# Altium PCB Keypad.PcbDoc
Units mil, origin at the board's own origin, x right, y up, seen from the top; angles counter-clockwise.
Board outline 2659 x 2418 mil, 2 copper layers (Top Layer, Bottom Layer); 22 components, 26 nets, 76 pads, 1 vias.
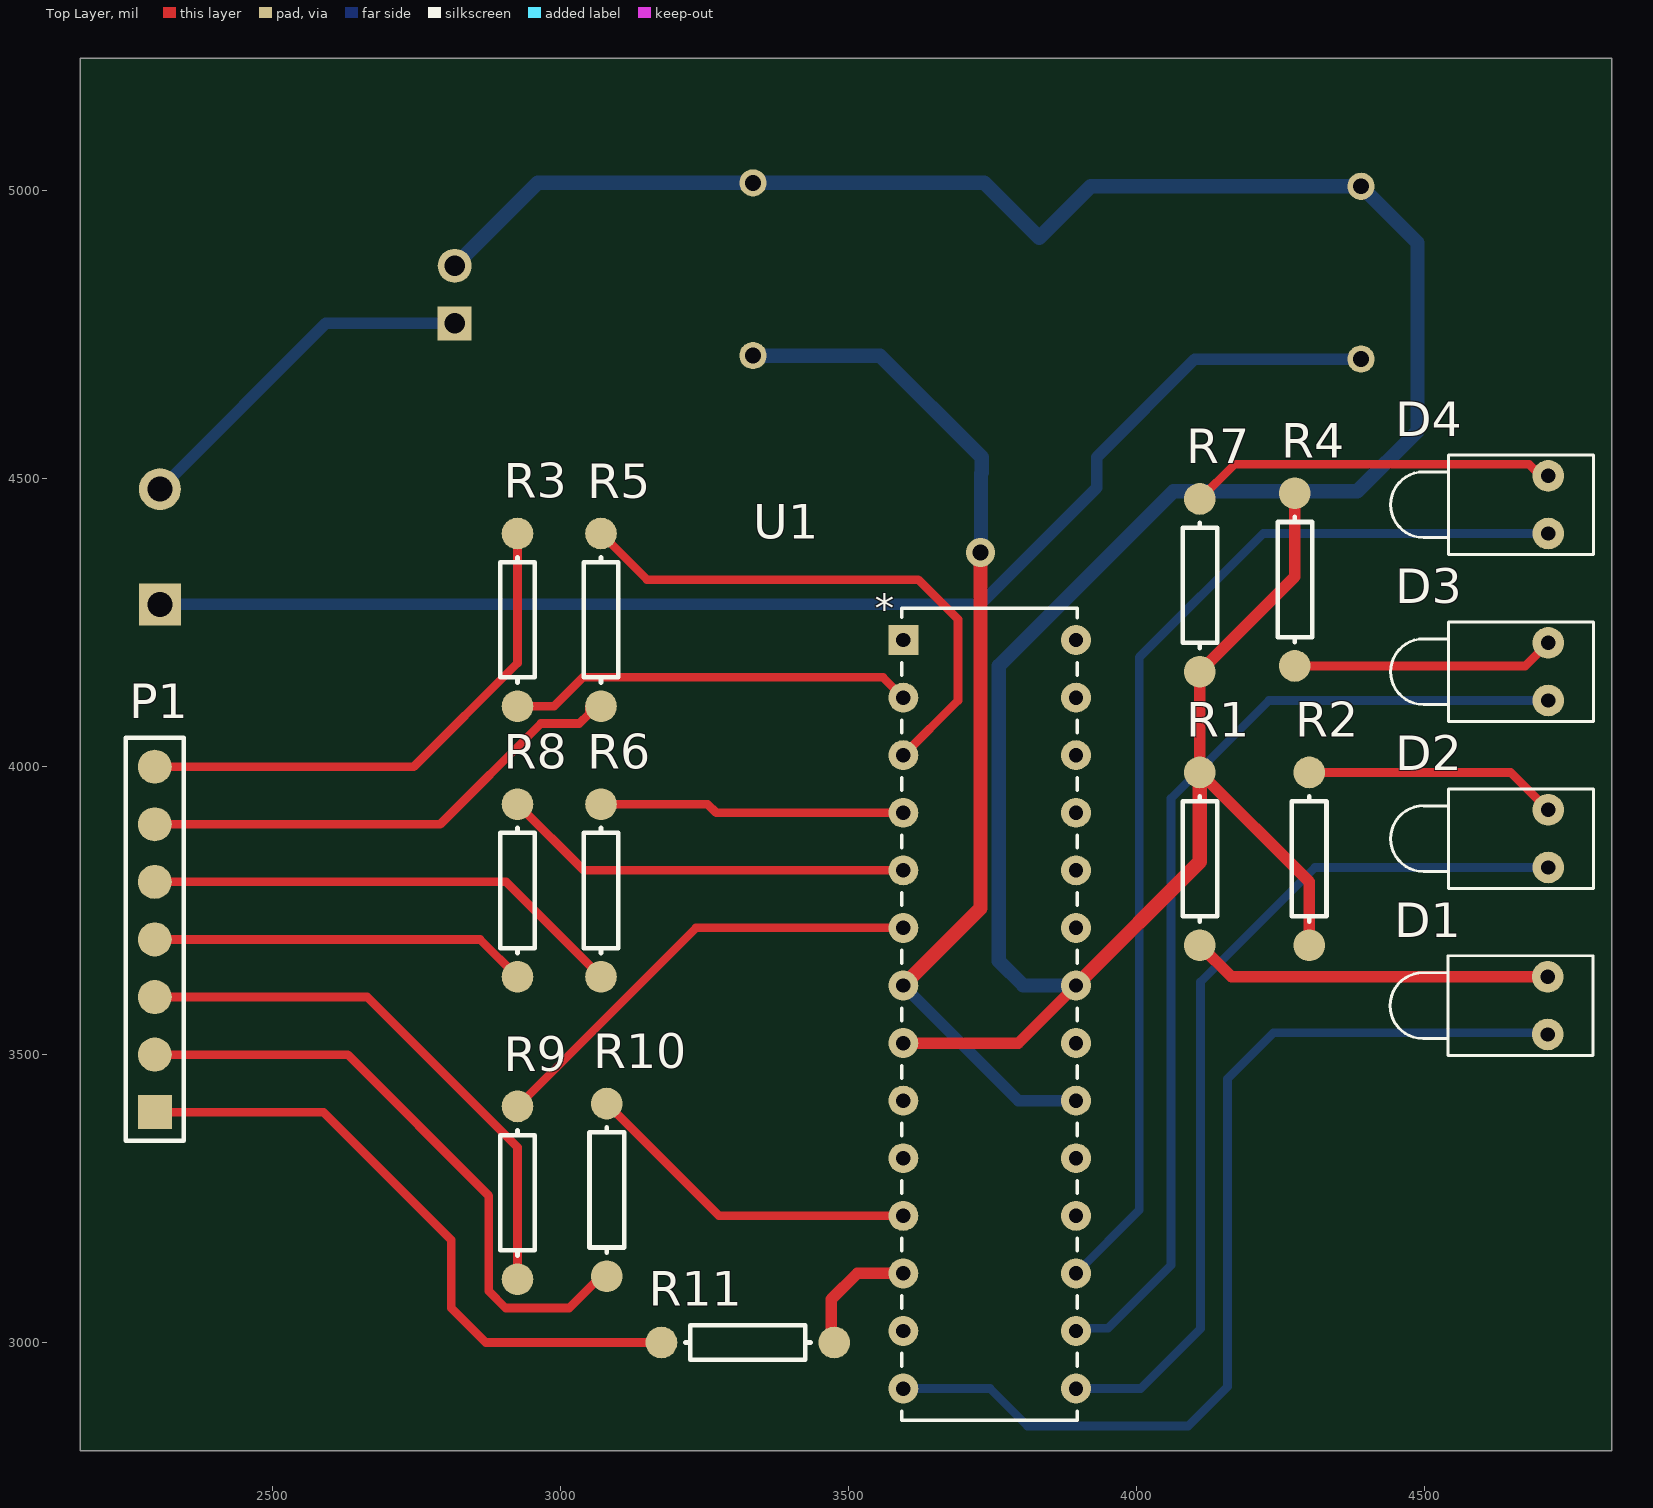
[diagram p0: Top Layer view]
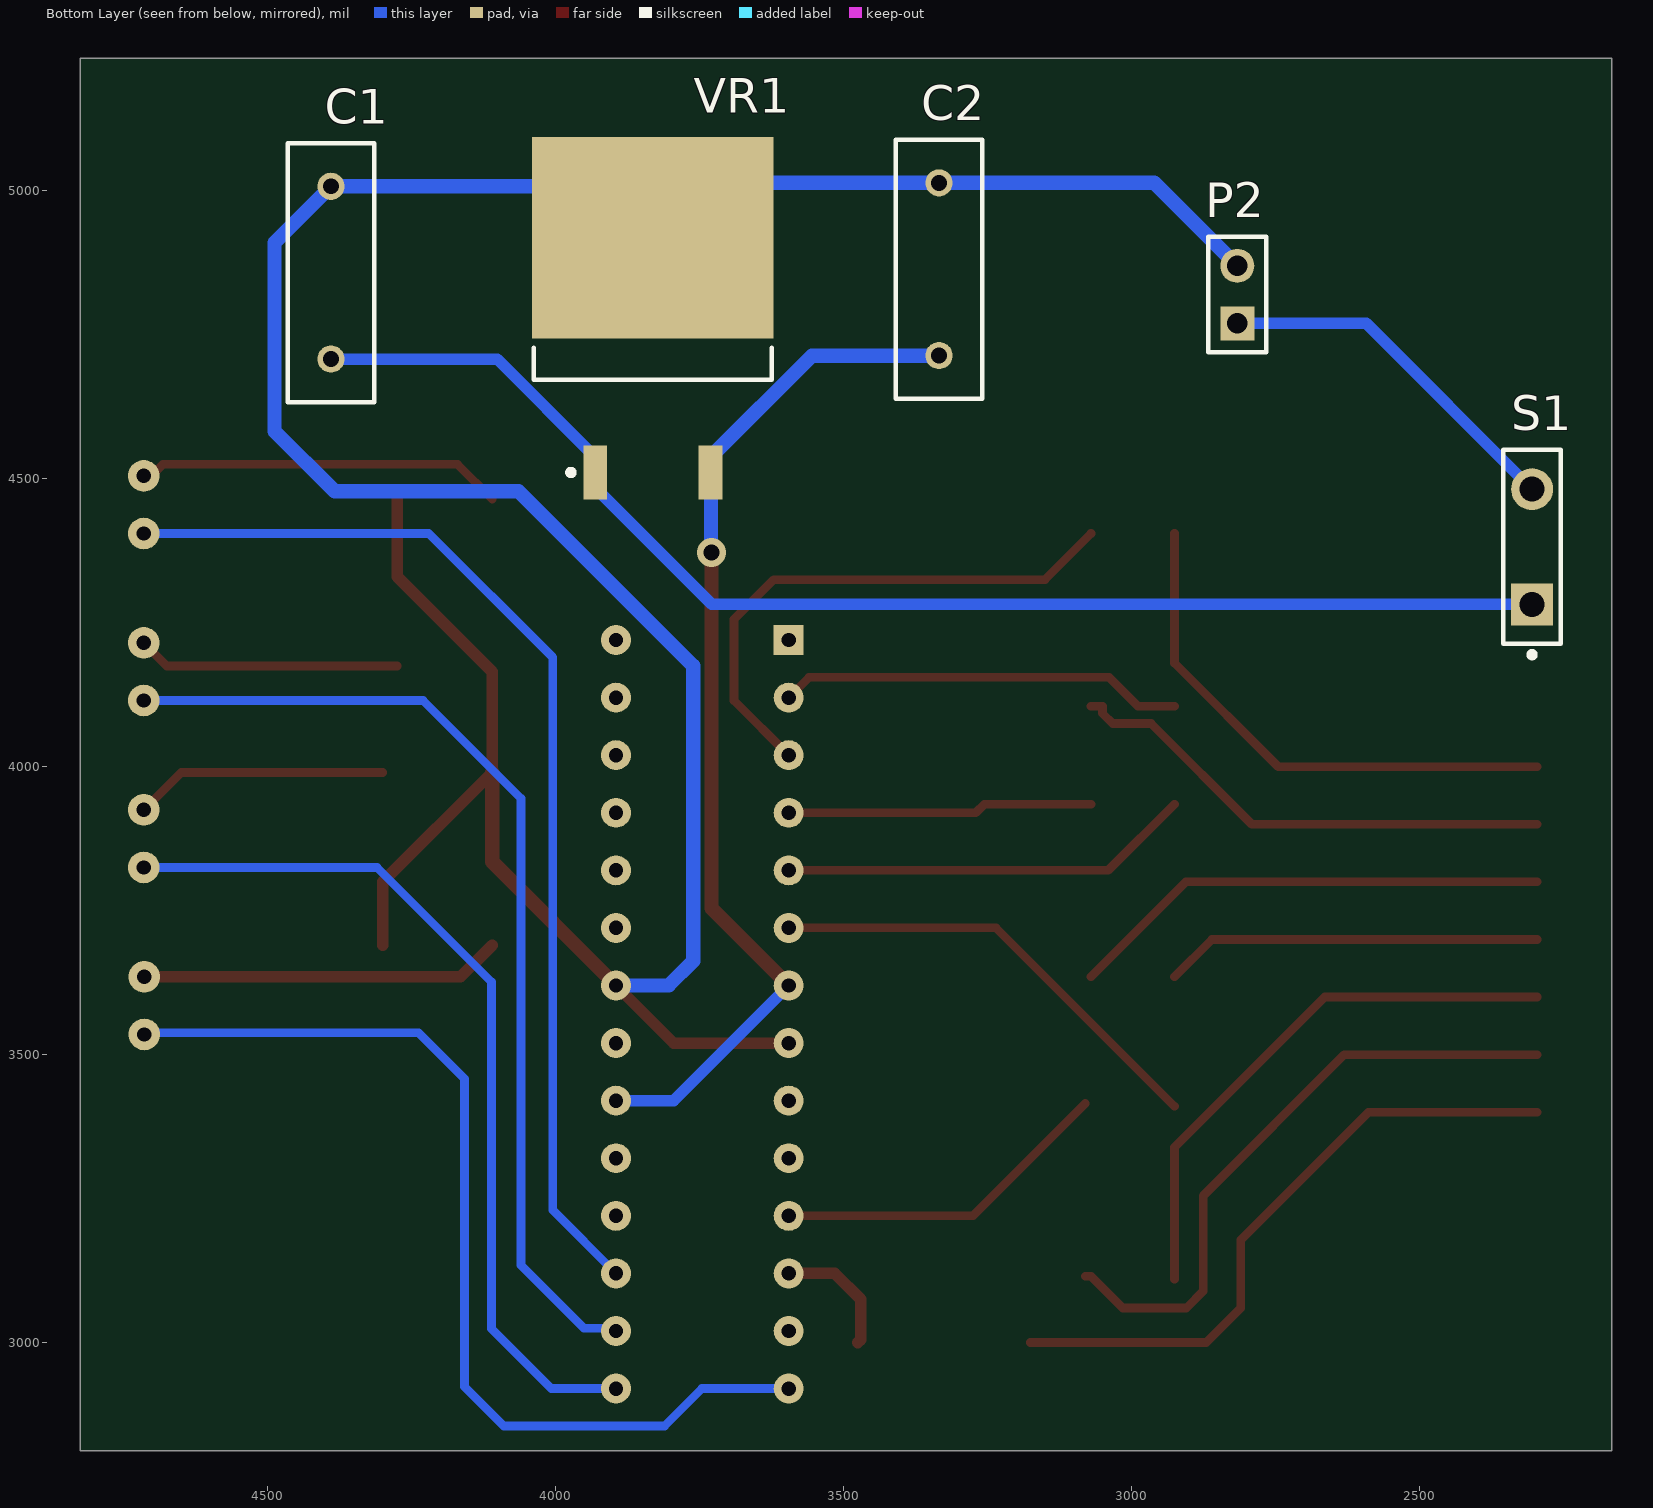
[diagram p1: Bottom Layer view, seen from below]

## Layer stack, top to bottom
Top Solder: solder mask 0.4, Solder Resist, Dk 3.5
Top Layer: signal copper 1.4
Dielectric 1: dielectric 12.6, FR-4, Dk 4.8
Bottom Layer: signal copper 1.4
Bottom Solder: solder mask 0.4, Solder Resist, Dk 3.5

## Board outline
2166,2812 4825,2812 4825,5230 2166,5230

## Design rules (kind name [scope] priority, off if disabled: settings)
Clearance [All] p1: gap=15 ignorepadtopadclearanceinfootprint=FALSE except(20: Arc-Hole Track-Hole SMDPad-Hole THPad-Hole Via-Hole Fill-Hole Poly-Hole Region-Hole Text-Hole)
PolygonConnect [All] p1: connectstyle=Relief reliefconductorwidth=10 reliefentries=4 polygonreliefangle="90 Angle" airgapwidth=10
RoutingVias [All] p1: holewidth=28 width=50 viastyle="Through Hole" minholewidth=28 minwidth=50 maxholewidth=28 maxwidth=50
SilkToSilkClearance [All] p1: silktosilkclearance=5
SilkToSolderMaskClearance [IsPad] p1: minsilkscreentomaskgap=5 clearancetoexposedcopper=TRUE
SolderMaskExpansion [All] p1: expansion=4
Width Width_1 [InNet('+5V0') or InNet('GND')] p1: maxlimit=25 minlimit=15 preferedwidth=20 minimp=50.000000 maximp=50.000000 favimp=50.000000
Width [All] p2: maxlimit=20 minlimit=10 preferedwidth=15 minimp=50.000000 maximp=50.000000 favimp=50.000000
28 further rules are at their usual default settings.

## Components (designator, comment, footprint, x,y, rotation, side; value= is the part's Value field where it differs from the comment)
C1 "Cap" RAD-0.3 4390,4858 r90 bottom value=330pF
C2 "Cap" RAD-0.3 3334,4864 r90 bottom value=100pF
D1 "LED1" LED-1 4714,3585 r180 top
D2 "LED1" LED-1 4715,3875 r180 top
D3 "LED1" LED-1 4715,4165 r180 top
D4 "LED1" LED-1 4715,4455 r180 top
P1 "Header 7" HDR1X7 2295,3400 r90 top
P2 "Battery Holder" HDR1X2 2816,4770 r90 bottom
R1 "220Ω" AXIAL-0.3 4110,3840 r90 top value=220
R2 "220Ω" AXIAL-0.3 4300,3840 r270 top value=220
R3 "100Ω" AXIAL-0.3 2925,4255 r270 top value=100
R4 "220Ω" AXIAL-0.3 4275,4325 r90 top value=220
R5 "100Ω" AXIAL-0.3 3070,4255 r90 top value=100
R6 "100Ω" AXIAL-0.3 3070,3785 r90 top value=100
R7 "220Ω" AXIAL-0.3 4110,4315 r270 top value=220
R8 "100Ω" AXIAL-0.3 2925,3785 r90 top value=100
R9 "100Ω" AXIAL-0.3 2925,3260 r90 top value=100
R10 "100Ω" AXIAL-0.3 3080,3265 r90 top value=100
R11 "100Ω" AXIAL-0.3 3325,3000 r0 top value=100
S1 "SW-SPST" SPST-2 2304,4382 r90 bottom
U1 "ATMEGA328-PU" 28P3_SPDIP28_SP_MCH 3595,4220 r0 top
VR1 "Volt Reg" D2PAK_N 3831,4778.72 r90 bottom

## Footprints (in the part's own frame and the unit in brackets; to place one, negate y for a bottom-side part, rotate by r counter-clockwise, add the part's x,y. Pads: shape width x height; smd on the part's side, far side on the other; paste and mask are expansions set on the pad)
28P3_SPDIP28_SP_MCH [mil]
  rect 52x52 hole 25 mask+0: 1(0,0)
  round 52 hole 25 mask+0: 2(0,-100) 3(0,-200) 4(0,-300) 5(0,-400) 6(0,-500) 7(0,-600) 8(0,-700) 9(0,-800) 10(0,-900) 11(0,-1000) 12(0,-1100) 13(0,-1200) 14(0,-1300) 15(300,-1300) 16(300,-1200) 17(300,-1100) 18(300,-1000) 19(300,-900) 20(300,-800) 21(300,-700) 22(300,-600) 23(300,-500) 24(300,-400) 25(300,-300) 26(300,-200) 27(300,-100) 28(300,0)
  silkscreen extent -2,-1355 302,55, body extent 0,0 10,10, height 10
AXIAL-0.3 [mm] "Axial Device, Thru-Hole; 2 Leads; 0.3 in Pin Spacing"
  round 1.4 smd: 1(-3.81,0) 2(3.81,0)
  silkscreen extent -2.77,-0.76 2.77,0.76
D2PAK_N [mm] "D2-PAK, 4-Leads, Body 8.8x10.4mm, Pitch 2.54mm, Lead Span 15.1mm, IPC Medium Density"
  rect 2.4x1.05 smd: 1(-6.8,2.54) 3(-6.8,-2.54)
  rect 8.9x10.65 smd: 2(3.55,0)
  silkscreen extent -6.92,-5.25 -1.3,5.25, body extent -2.7,-5.28 6.3,5.28, height 4.69
HDR1X2 [mm] "Connector; Header; 2 Position"
  rect 1.5x1.5 hole 0.9: 1(0,0)
  round 1.5 hole 0.9: 2(2.54,0)
  silkscreen extent -1.27,-1.27 3.81,1.27
HDR1X7 [mm] "Connector; Header; 7 Position"
  rect 1.5x1.5 smd: 1(0,0)
  round 1.5 smd: 2(2.54,0) 3(5.08,0) 4(7.62,0) 5(10.16,0) 6(12.7,0) 7(15.24,0)
  silkscreen extent -1.27,-1.27 16.51,1.27
LED-1 [mil] "LED; 2 Leads"
  round 55 hole 25: 1(0,50) 2(0,-50)
  silkscreen extent -79,-87 274,87
RAD-0.3 [mm] "Radial Cap, Thru-Hole; 2 Leads; 0.3 in Pin Spacing"
  round 1.2 hole 0.7: 1(-3.81,0) 2(3.81,0)
  silkscreen extent -5.71,-1.91 5.71,1.91
SPST-2 [mm] "Switch; 2 Leads"
  rect 1.85x1.85 hole 1.1: 1(-2.54,0)
  round 1.85 hole 1.1: 2(2.54,0)
  silkscreen extent -4.89,-1.27 4.28,1.27

## Part data
C1 C2: "Capacitor", LatestRevisionDate=17-Jul-2002, LatestRevisionNote="Re-released for DXP Platform.", PackageDescription="Radial Cap, Thru-Hole; 2 Leads; 0.3 in Pin Spacing", PackageReference=RAD-0.3, Published=8-Jun-2000, Publisher="Altium Limited"
D1 D2 D3 D4: "Typical RED GaAs LED", LatestRevisionDate=08-Jul-2005, LatestRevisionNote="Mech Layer 1 removed.", PackageDescription="LED; 2 Leads", PackageReference=LED-1, Published=8-Jun-2000, Publisher="Altium Limited"
P1: "Header, 7-Pin", LatestRevisionDate=17-Jul-2002, LatestRevisionNote="Re-released for DXP Platform.", Publisher="Altium Limited"
P2: library part "Header 2", "Header, 2-Pin", LatestRevisionDate=17-Jul-2002, LatestRevisionNote="Re-released for DXP Platform.", Publisher="Altium Limited"
R1 R2 R3 R4 R5 R6 R7 R8 R9 R10 R11: library part Res1, "Resistor", LatestRevisionDate=17-Jul-2002, LatestRevisionNote="Re-released for DXP Platform.", PackageDescription="Axial Device, Thru-Hole; 2 Leads; 0.3 in Pin Spacing", PackageReference=AXIAL-0.3, Published=8-Jun-2000, Publisher="Altium Limited"
S1: "Single-Pole, Single-Throw Switch", LatestRevisionDate=17-Jul-2002, LatestRevisionNote="Re-released for DXP Platform.", PackageDescription="Switch; 2 Leads", PackageReference=SPST-2, Published=24-Mar-1999, Publisher="Altium Limited"
U1: "No Description Available", Built_By=EMA_Cory, Copyright="Copyright (C) 2018 Accelerated Designs. All rights reserved", Datasheet=https://ww1.microchip.com/downloads/en/DeviceDoc/ATmega48A-PA-88A-PA-168A-PA-328-P-DS-DS40002061B.pdf, Manufacturer_Part_Number=ATMEGA328-PU, RefDes=RefDes, SourceLibrary=Update_to_database_2021-05-13, Type=DEV, Vendor=Microchip
VR1: "Voltage Regulator", LatestRevisionDate=29-May-2009, LatestRevisionNote="IPC-7351 Footprint Added.", PackageDescription="3-Pin Transistor Outline Package 2.54 mm Pitch, 15.1 mm Lead Span", PackageReference=D2PAK, Published=24-Mar-1999, Publisher="Altium Limited"

## Via types
v1: diameter 50, hole 28, Top Layer to Bottom Layer, 1 vias

## Nets (pads, with @x,y where several pads share a name; then routed paths per layer and width w, separated by ;. In a path a pad name is that pad's centre, name@x,y a point inside that pad or via, vN(x,y) a via of type N, cw(c..) or ccw(c..) an arc to the next point about the centre after c; other vN are vias at no path point)
+5V0: C2.1 U1.7 U1.20 VR1.3 | length 1826.8
  Top Layer w25: U1.7 3729,3754 v1(3729,4372)
  Bottom Layer w20: U1.7 3795,3420 U1.20
  Bottom Layer w25: C2.1 3554.57,4714 3731,4537.57 VR1.3 3730,4510 3730,4373 v1(3729,4372)
GND: C1.2 C2.2 P2.2 R1.2 R2.2 R4.2 R7.2 U1.8 U1.22 VR1.2 | length 5468.6
  Top Layer w20: U1.8 3795,3520 U1.22 ; R4.2 4275,4330 R7.2 R1.2 4300,3800 R2.2
  Top Layer w25: U1.22 4110,3835 R1.2
  Bottom Layer w25: P2.2 2960,5014 C2.2 3735.48,5014 VR1.2 3920.52,5008 C1.2 4488,4910 4488,4582.71 4383.64,4478.36 4064.36,4478.36 3761,4175 3761,3662.64 3803.64,3620 U1.22
NetD1_1: D1.1 U1.14 | length 1743.5
  Bottom Layer w15: U1.14 3745.68,2920 3810.68,2855 4090,2855 4158,2923 4158,3458 4238,3538 4711,3538 D1.1
NetD1_2: D1.2 R1.1 | length 639.8
  Top Layer w15: D1.2@4702.01,3650 D1.2@4715,3650
  Top Layer w20: R1.1 4165,3635 D1.2
NetD2_1: D2.1 U1.15 | length 1547.7
  Bottom Layer w15: U1.15 4007.25,2920 4111.25,3024 4111.25,3626.25 4310,3825 D2.1
NetD2_2: D2.2 R2.1 | length 441.9
  Top Layer w15: R2.1 4650,3990 D2.2
NetD3_1: D3.1 U1.16 | length 1748.6
  Bottom Layer w15: U1.16@3900,3025 3951,3025 4060,3134 4060,3945 4230,4115 D3.1
  Bottom Layer w20: U1.16 U1.16@3900,3025
NetD3_2: D3.2 R4.1 | length 456.6
  Top Layer w15: R4.1 4675,4175 D3.2
NetD4_1: D4.1 U1.17 | length 1914.6
  Bottom Layer w15: U1.17 4005,3230 4005,3257 4005,4190 4220,4405 D4.1
NetD4_2: D4.2 R7.1 | length 638.2
  Top Layer w15: R7.1 4170.06,4525.06 4681.95,4525.06 4702.01,4505 D4.2
NetP1_1: P1.1 R11.1 | length 1114.9
  Top Layer w15: P1.1 2588.1,3400 2810,3178.1 2810,3060 2870,3000 R11.1
NetP1_2: P1.2 R10.1 | length 1087.2
  Top Layer w15: P1.2 2630,3500 2874.94,3255.06 2874.94,3089.26 2904.26,3059.94 3014.94,3059.94 3070,3115 R10.1
NetP1_3: P1.3 R9.1 | length 967.2
  Top Layer w15: P1.3 2664.21,3600 2925,3339.21 R9.1
NetP1_4: P1.4 R8.1 | length 656.9
  Top Layer w15: P1.4 2860,3700 R8.1
NetP1_5: P1.5 R6.1 | length 843.3
  Top Layer w15: P1.5 2905,3800 R6.1
NetP1_6: P1.6 R5.1 | length 867.2
  Top Layer w15: P1.6 2790.79,3900 2965.79,4075 3032.37,4075 3049.94,4092.57 3049.94,4105 R5.1
NetP1_7: P1.7 R3.1 | length 929.6
  Top Layer w15: P1.7 2745,4000 2925,4180 R3.1
NetP2_1: P2.1 S1.2 | length 631.3
  Bottom Layer w20: S1.2 2592,4770 P2.1
NetR3_2: R3.2 U1.2 | length 705.3
  Top Layer w15: R3.2 2988.27,4105 3038.33,4155.06 3559.94,4155.06 U1.2
NetR5_2: R5.2 U1.3 | length 957.1
  Top Layer w15: R5.2 3150,4325 3621,4325 3690,4256 3690,4115 U1.3
NetR6_2: R6.2 U1.4 | length 531.2
  Top Layer w15: R6.2 3255,3935 3270,3920 U1.4
NetR8_2: R8.2 U1.5 | length 717.6
  Top Layer w15: R8.2 3040,3820 U1.5
NetR9_2: R9.2 U1.6 | length 798.4
  Top Layer w15: R9.2 3235,3720 U1.6
NetR10_2: R10.2 U1.11 | length 595.8
  Top Layer w15: R10.2 3275,3220 U1.11
NetR11_2: R11.2 U1.12 | length 220.7
  Top Layer w20: R11.2 3470,3005 3470,3075 3515,3120 U1.12
VCC: C1.1 S1.1 VR1.1 | length 2293.6
  Bottom Layer w20: S1.1 3728.57,4282 3931,4484.43 VR1.1 3931,4537.57 4101.43,4708 C1.1
pads on no net: U1.1 U1.9 U1.10 U1.13 U1.18 U1.19 U1.21 U1.23 U1.24 U1.25 U1.26 U1.27 U1.28

## Dimensions
4715,3925 to 4715,3825 on Mechanical 1
4715,4405 to 4715,4215 on Mechanical 1
4714,3535 to 4825,2812 on Mechanical 1
4715,4505 to 4825,5230 on Mechanical 1
2245,4050 to 2245,3350 on Mechanical 1
4825,5230 to 4825,2812 on Mechanical 1
2166,2812 to 4825,2812 on Mechanical 1

## Text inside footprints (layer, text, board x,y; h text height)
U1: Top Overlay "*" at 3545,4250 h50; Mechanical 7 "Default Padstyle: c132h81" at 3432.5,2644 h50; Mechanical 7 "Pin 1 Padstyle: s132h81" at 3457.5,2544 h50; Mechanical 7 "Alt 1 Padstyle: b152_229h76" at 3407.5,2494 h50; Mechanical 7 "Alt 2 Padstyle: b229_152h76" at 3407.5,2444 h50; Mechanical 7 "0.1in/2.54mm" at 3325,4157.5 h25; Mechanical 7 "0.3in/7.62mm" at 3670,2775 h25; Mechanical 7 "0.295in/7.493mm" at 3651.25,4340 h25; Mechanical 7 "1.4in/35.56mm" at 4015,3557.5 h25; Mechanical 13 "*" at 3595,4195 h50